# EAGLE board MSP-EXP430FR5739_1_1_4 (EAGLE 5.10)
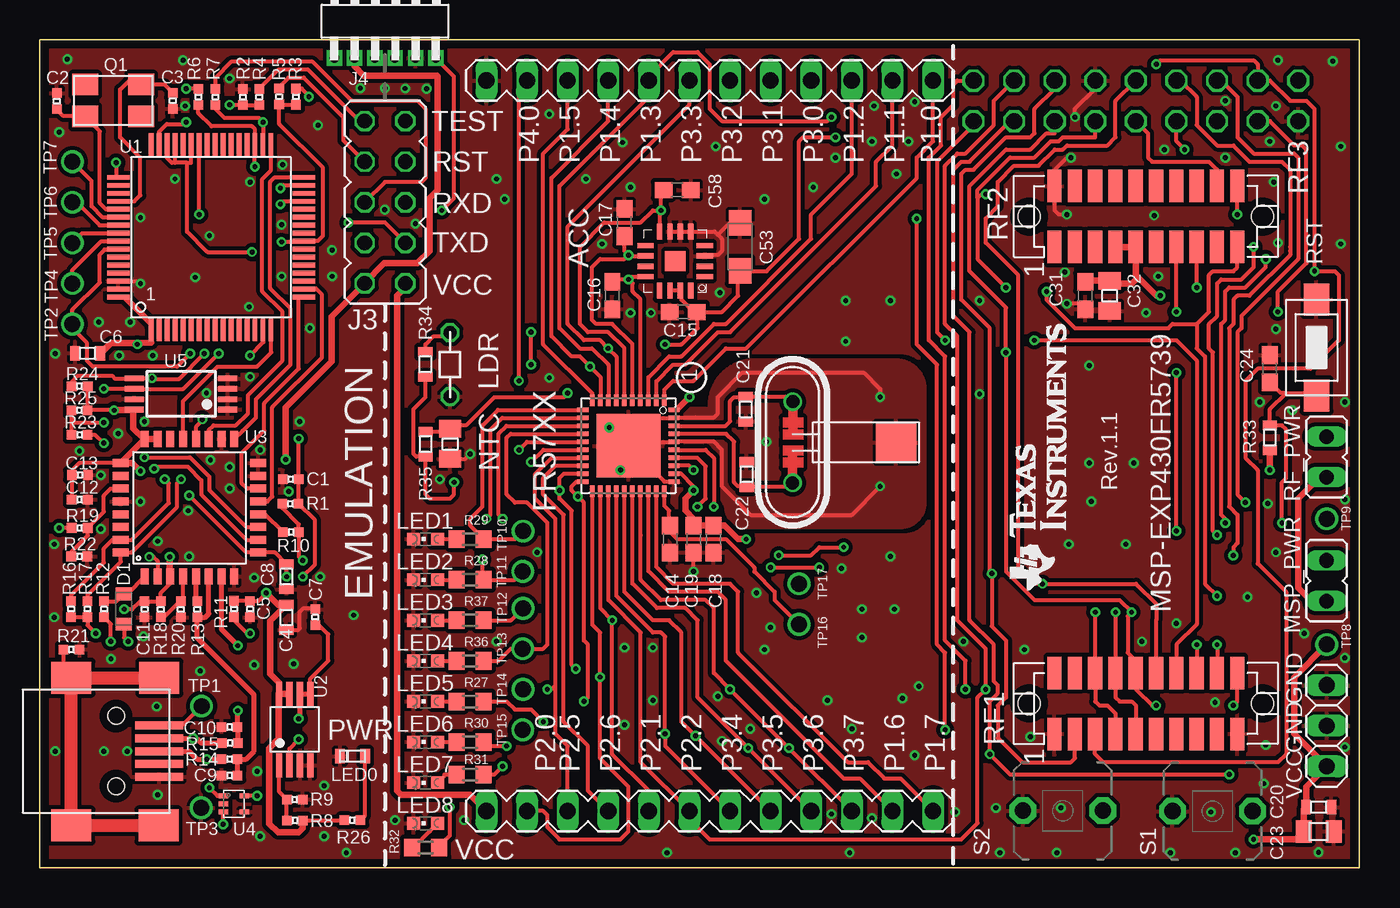
[diagram p0: board, top side]
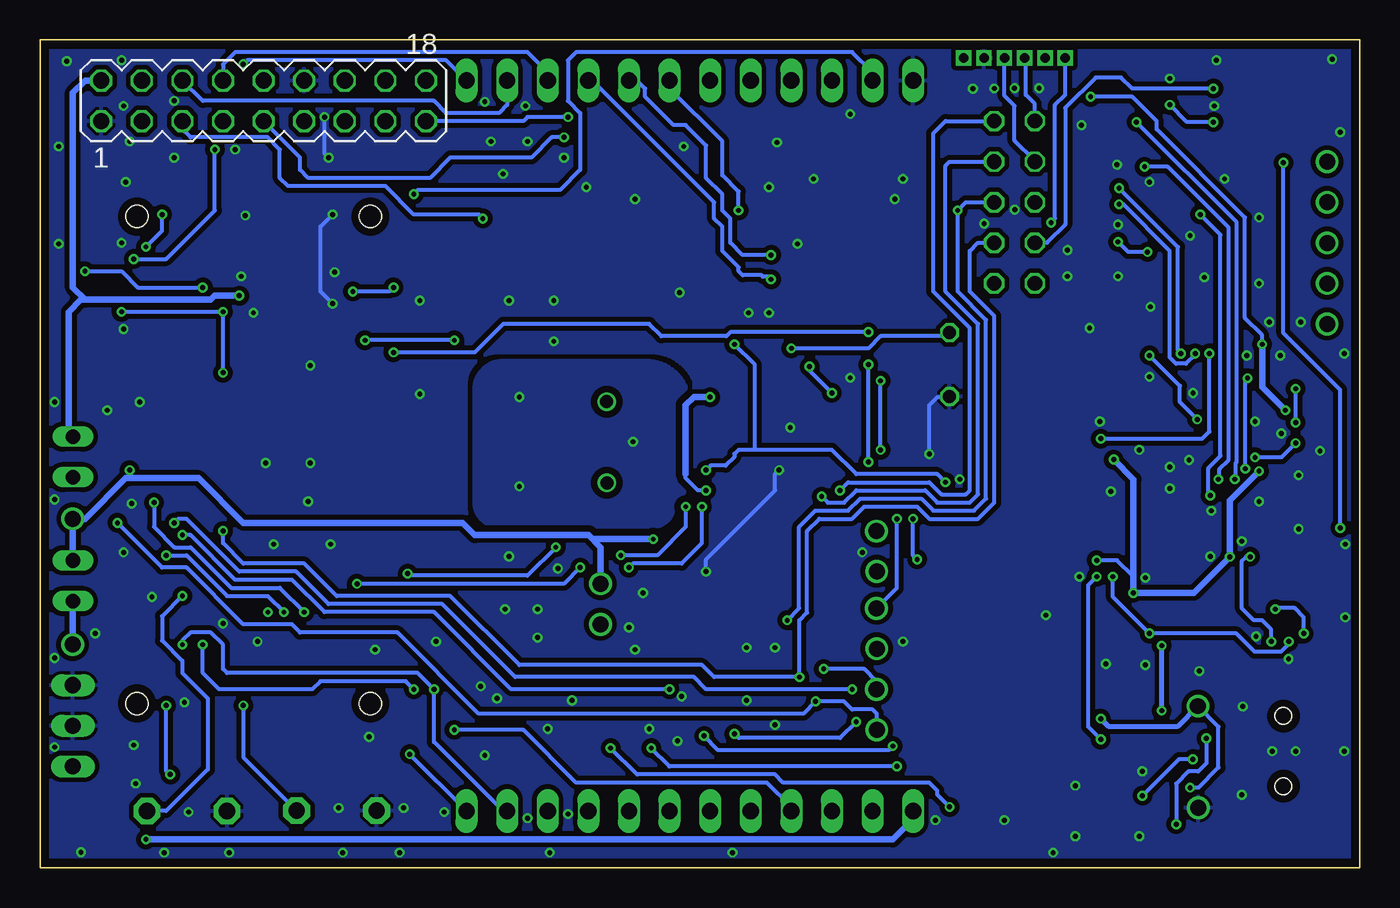
[diagram p1: board, bottom side, seen from below]

Size 82.55 x 51.82 mm. Coordinates in mm from the lower left corner, seen from the top.
Outline: 0,0 82.55,0 82.55,51.82 0,51.82 0,0
Copper layers (1+2*15+16): Top 0.0178mm / dielectric 0.3048mm / Route2 0.0356mm / dielectric 0.6858mm / Route15 0.0356mm / dielectric 0.3048mm / Bottom 0.0178mm
Design rules "FR57xx Design Rules *": minimum track width 6mil, minimum drill 10mil, track to track 6mil, track to pad 6mil, pad to pad 6mil, via to via 6mil, smd to smd 6mil, copper to edge 20mil, drill to drill 8mil, minimum pad ring 7mil, minimum via ring 6mil, stop-mask expansion 0mil, vias tented up to drill 25mil, thermal gap 8mil
Net classes: 0 default: width 0.1 mm, drill 0.2 mm; 1 Ground: width 0.203 mm, drill 0.61 mm; 2 Power: width 0.406 mm, drill 0.305 mm, clearance 0.152 mm to class 0, clearance 0.152 mm to class 1, clearance 0.152 mm

## Footprints (pad centres in the part's own frame; a part is rotated, then mirrored left to right if it is on the bottom)
RSA16 = smd 1.016 x 0.33: 1 -1.85,0.975; 2 -1.85,0.325; 3 -1.85,-0.325; 4 -1.85,-0.975; 9 1.85,-0.975; 10 1.85,-0.325; 11 1.85,0.325; 12 1.85,0.975 | smd 0.33 x 1.016: 5 -0.975,-1.85; 6 -0.325,-1.85; 7 0.325,-1.85; 8 0.975,-1.85; 13 0.975,1.85; 14 0.325,1.85; 15 -0.325,1.85; 16 -0.975,1.85 | smd 1.27 x 1.27: TP 0,0
0402 = smd 0.6 x 0.6: 1 -0.501,0; 2 0.501,0
0603 = smd 0.6 x 0.9: 1 -0.787,0; 2 0.787,0
C0603 = smd 1.1 x 1: 1 -0.85,0; 2 0.85,0
0805 = smd 1 x 1.4: 1 -0.94,0; 2 0.94,0
CSMD0805 = smd 1.092 x 1.397: 1 -0.94,0; 2 0.94,0
SMC_A = smd 1.6 x 1.4: + -1.5,0; - 1.5,0
SOD110-R = smd 0.8 x 1: A 0.95,0; C -0.95,0
RHA40 = smd 0.7 x 0.3: 1 -2.85,2.25; 2 -2.85,1.75; 3 -2.85,1.25; 4 -2.85,0.75; 5 -2.85,0.25; 6 -2.85,-0.25; 7 -2.85,-0.75; 8 -2.85,-1.25; 9 -2.85,-1.75; 10 -2.85,-2.25; 21 2.85,-2.25; 22 2.85,-1.75; 23 2.85,-1.25; 24 2.85,-0.75; 25 2.85,-0.25; 26 2.85,0.25; 27 2.85,0.75; 28 2.85,1.25; 29 2.85,1.75; 30 2.85,2.25 | smd 0.3 x 0.7: 11 -2.25,-2.85; 12 -1.75,-2.85; 13 -1.25,-2.85; 14 -0.75,-2.85; 15 -0.25,-2.85; 16 0.25,-2.85; 17 0.75,-2.85; 18 1.25,-2.85; 19 1.75,-2.85; 20 2.25,-2.85; 31 2.25,2.85; 32 1.75,2.85; 33 1.25,2.85; 34 0.75,2.85; 35 0.25,2.85; 36 -0.25,2.85; 37 -0.75,2.85; 38 -1.25,2.85; 39 -1.75,2.85; 40 -2.25,2.85 | smd 4 x 4: TP 0,0
JP5Q = drill 0.914 octagon: 1 -5.08,-1.27; 2 -5.08,1.27; 3 -2.54,-1.27; 4 -2.54,1.27; 5 0,-1.27; 6 0,1.27; 7 2.54,-1.27; 8 2.54,1.27; 9 5.08,-1.27; 10 5.08,1.27
SL127L6_MPE = drill 0.6 pad 0.889 square: 1 -3.17,0.07; 2 -1.91,0.07; 3 -0.63,0.07; 4 0.63,0.07; 5 1.91,0.07; 6 3.18,0.07
1X03 = drill 1.016 long: 1 -2.54,0; 2 0,0; 3 2.54,0
R-3,4 = drill 0.813 octagon: 1 -2.003,0; 2 2.003,0
DIODE0603 = smd 0.6 x 0.9: A -0.787,0; K 0.787,0
CHIPLED_0603 = smd 0.8 x 0.8: A 0,-0.75; C 0,0.75
JP1 = drill 0.914 long: 1 0,-1.27; 2 0,1.27
0805' = smd 1.092 x 1.397: 1 -0.94,0; 2 0.94,0
FT10A = smd 1.6 x 1.35: P$1 -1.75,-1; P$2 1.75,-1; P$3 1.75,1; P$4 -1.75,1
QUARZ5 = drill 0.813 round: 1 1.53,1.773; 2 1.52,-3.303 | smd 2.54 x 2.54: GND@0 -4.941,-0.762
R0603 = smd 1 x 1.1: 1 -0.85,0; 2 0.85,0
TFM-110-02-SM-D-A-K = smd 2.032 x 0.889: 1 -1.27,5.08; 2 2.54,5.08; 3 -1.27,3.81; 4 2.54,3.81; 5 -1.27,2.54; 6 2.54,2.54; 7 -1.27,1.27; 8 2.54,1.27; 9 -1.27,0; 10 2.54,0; 11 -1.27,-1.27; 12 2.54,-1.27; 13 -1.27,-2.54; 14 2.54,-2.54; 15 -1.27,-3.81; 16 2.54,-3.81; 17 -1.27,-5.08; 18 2.54,-5.08; 19 -1.27,-6.35; 20 2.54,-6.35 | hole 1.359: 0.635,6.668; 0.635,-7.938
MA09-2 = drill 1.016 octagon: 1 -10.16,-1.27; 2 -10.16,1.27; 3 -7.62,-1.27; 4 -7.62,1.27; 5 -5.08,-1.27; 6 -5.08,1.27; 7 -2.54,-1.27; 8 -2.54,1.27; 9 0,-1.27; 10 0,1.27; 11 2.54,-1.27; 12 2.54,1.27; 13 5.08,-1.27; 14 5.08,1.27; 15 7.62,-1.27; 16 7.62,1.27; 17 10.16,-1.27; 18 10.16,1.27
EVQPPDA = smd 2 x 1.6: 1 -3,0; 2 3,0
PBTH = drill 1.016 pad 1.676 octagon: 1 -0.001,0.001; 2 5.001,0.001
MA12-1 = drill 1.016 long: 1 -13.97,0; 2 -11.43,0; 3 -8.89,0; 4 -6.35,0; 5 -3.81,0; 6 -1.27,0; 7 1.27,0; 8 3.81,0; 9 6.35,0; 10 8.89,0; 11 11.43,0; 12 13.97,0
TP10 = drill 1 pad 1.422 round: 1 0,0
PM/PAG64 = smd 1.4 x 0.3: 1 -5.88,3.67; 2 -5.88,3.17; 3 -5.88,2.67; 4 -5.88,2.17; 5 -5.88,1.67; 6 -5.88,1.17; 7 -5.88,0.67; 8 -5.88,0.17; 9 -5.88,-0.33; 10 -5.88,-0.83; 11 -5.88,-1.33; 12 -5.88,-1.83; 13 -5.88,-2.33; 14 -5.88,-2.83; 15 -5.88,-3.33; 16 -5.88,-3.83; 33 5.72,-3.83; 34 5.72,-3.33; 35 5.72,-2.83; 36 5.72,-2.33; 37 5.72,-1.83; 38 5.72,-1.33; 39 5.72,-0.83; 40 5.72,-0.33; 41 5.72,0.17; 42 5.72,0.67; 43 5.72,1.17; 44 5.72,1.67; 45 5.72,2.17; 46 5.72,2.67; 47 5.72,3.17; 48 5.72,3.67 | smd 0.3 x 1.4: 17 -3.83,-5.88; 18 -3.33,-5.88; 19 -2.83,-5.88; 20 -2.33,-5.88; 21 -1.83,-5.88; 22 -1.33,-5.88; 23 -0.83,-5.88; 24 -0.33,-5.88; 25 0.17,-5.88; 26 0.67,-5.88; 27 1.17,-5.88; 28 1.67,-5.88; 29 2.17,-5.88; 30 2.67,-5.88; 31 3.17,-5.88; 32 3.67,-5.88; 49 3.67,5.72; 50 3.17,5.72; 51 2.67,5.72; 52 2.17,5.72; 53 1.67,5.72; 54 1.17,5.72; 55 0.67,5.72; 56 0.17,5.72; 57 -0.33,5.72; 58 -0.83,5.72; 59 -1.33,5.72; 60 -1.83,5.72; 61 -2.33,5.72; 62 -2.83,5.72; 63 -3.33,5.72; 64 -3.83,5.72
MSOP8 = smd 0.4 x 1.5: 1 -0.978,-2.3; 2 -0.333,-2.3; 3 0.323,-2.3; 4 0.968,-2.3; 5 0.968,2.18; 6 0.323,2.18; 7 -0.333,2.18; 8 -0.978,2.18
QFP32 = smd 0.5 x 1: 1 -2.8,-4.3; 2 -2,-4.3; 3 -1.2,-4.3; 4 -0.4,-4.3; 5 0.4,-4.3; 6 1.2,-4.3; 7 2,-4.3; 8 2.8,-4.3; 17 2.8,4.3; 18 2,4.3; 19 1.2,4.3; 20 0.4,4.3; 21 -0.4,4.3; 22 -1.2,4.3; 23 -2,4.3; 24 -2.8,4.3 | smd 1 x 0.5: 9 4.3,-2.8; 10 4.3,-2; 11 4.3,-1.2; 12 4.3,-0.4; 13 4.3,0.4; 14 4.3,1.2; 15 4.3,2; 16 4.3,2.8; 25 -4.3,2.8; 26 -4.3,2; 27 -4.3,1.2; 28 -4.3,0.4; 29 -4.3,-0.4; 30 -4.3,-1.2; 31 -4.3,-2; 32 -4.3,-2.8
TPD2E001-DRL = smd 0.3 x 0.6: 1 -0.5,-0.65; 2 0,-0.65; 3 0.5,-0.65; 4 0.5,0.65; 5 -0.5,0.65
TSSOP8 = smd 1.2 x 0.35: 1 -2.925,0.975; 2 -2.925,0.325; 3 -2.925,-0.325; 4 -2.925,-0.975; 5 2.925,-0.975; 6 2.925,-0.325; 7 2.925,0.325; 8 2.925,0.975
USB_MINI_B = smd 0.5 x 3: 1 -1.6,8.55; 2 -0.8,8.55; 3 0,8.55; 4 0.8,8.55; 5 1.6,8.55 | smd 2 x 2.5: S1 -4.6,8.55; S2 -4.6,3.05; S3 4.65,3.05; S4 4.65,8.5 | hole 1.016: -2.2,5.85; 2.2,5.85

## Placement (x,y rotation side)
ACC  ADXL322/330  [RSA16]  39.75,37.97 180 top
C1  10n  [0402]  15.69,24.32 180 top
C2  16p  [0402]  1.06,47.99 90 top
C3  16p  [0402]  8.31,48.01 270 top
C4  1u/6.3V  [0603]  15.42,15.67 90 top
C5  100n  [0402]  13.14,16.19 270 top
C6  1u/6.3V  [0603]  2.98,32.21 180 top
C7  100n  [0402]  17.23,15.68 270 top
C8  1u/6.3V  [0603]  15.43,18.22 270 top
C9  22p  [0402]  11.86,5.78 0 top
C10  22p  [0402]  11.86,8.82 0 top
C11  100n  [0402]  6.55,16.19 90 top
C12  100n  [0402]  2.49,23.05 180 top
C13  100n  [0402]  2.49,24.59 0 top
C14  470n  [C0603]  39.43,20.57 270 top
C15  .1u  [C0603]  40.26,34.8 180 top
C16  .1u  [C0603]  35.81,35.81 270 top
C17  .1u  [C0603]  36.58,40.39 90 top
C18  0.1u  [C0603]  42.14,20.57 270 top
C19  10u  [C0603]  40.89,20.57 270 top
C20  100nF  [0603]  80.02,3.8 180 top
C21  12pF  [0603]  44.17,28.71 90 top
C22  12pF  [0603]  44.22,24.61 270 top
C23  10uF/10V  [0805]  80.02,2.27 180 top
C24  2.2n  [C0603]  76.96,31.24 90 top
C31  .1u  [C0603]  65.41,35.81 270 top
C32  4.7u  [CSMD0805]  66.94,35.8 270 top
C53  4.7u  [SMC_A]  43.81,38.86 90 top
C58  .1u  [C0603]  39.88,42.42 0 top
D1  1N4148  [SOD110-R]  5.25,16.2 90 top
FR57XX  FR57XX--RHA40RHAPACKAGE  [RHA40]  36.82,26.42 270 top
J3  [JP5Q]  21.59,41.66 90 top
J4  SL127L6TH  [SL127L6_MPE]  21.59,50.61 0 top
J6  [1X03]  80.52,8.89 90 top
LDR  [R-3,4]  25.65,31.5 270 top
LED0  green  [DIODE0603]  19.56,6.99 180 top
LED1  [CHIPLED_0603]  24.13,20.57 90 top
LED2  [CHIPLED_0603]  24.13,18.03 90 top
LED3  [CHIPLED_0603]  24.13,15.49 90 top
LED4  [CHIPLED_0603]  24.13,12.95 90 top
LED5  [CHIPLED_0603]  24.13,10.41 90 top
LED6  [CHIPLED_0603]  24.13,7.87 90 top
LED7  [CHIPLED_0603]  24.13,5.33 90 top
LED8  [CHIPLED_0603]  24.13,2.79 90 top
MSP_PWR  [JP1]  80.52,17.97 0 top
NTC  100k  [0805']  25.67,26.53 90 top
Q1  12MHz  [FT10A]  4.58,48.02 0 top
Q2  QUARZ5  [QUARZ5]  48.63,25.87 180 top
R1  47k  [0402]  15.68,22.79 180 top
R2  47k  [0402]  12.7,48.24 90 top
R3  47k  [0402]  16.01,48.26 90 top
R4  100R  [0402]  13.72,48.25 90 top
R5  100R  [0402]  14.97,48.28 90 top
R6  100R  [0402]  9.91,48.26 90 top
R7  100R  [0402]  10.98,48.25 90 top
R8  61k5  [0402]  15.95,2.97 0 top
R9  33k  [0402]  15.95,4.27 180 top
R10  10k  [0402]  15.71,21.01 0 top
R11  15k  [0402]  12.15,16.2 90 top
R12  33k  [0402]  4.02,16.18 270 top
R13  1k5  [0402]  9.84,16.18 90 top
R14  33R  [0402]  11.87,6.81 0 top
R15  33R  [0402]  11.89,7.82 0 top
R16  47k  [0402]  1.95,16.19 270 top
R17  47k  [0402]  2.97,16.19 270 top
R18  100k/1%  [0402]  7.56,16.18 90 top
R19  3k3  [0402]  2.49,21.27 180 top
R20  100k/1%  [0402]  8.82,16.18 90 top
R21  33k  [0402]  1.98,13.66 180 top
R22  3k3  [0402]  2.46,19.49 0 top
R23  100R  [0402]  2.48,27.1 0 top
R24  1k5  [0402]  2.49,30.14 180 top
R25  1k5  [0402]  2.48,28.64 180 top
R26  270  [0402]  19.56,2.98 180 top
R27  330  [R0603]  26.92,10.41 0 top
R28  330  [R0603]  26.92,18.03 0 top
R29  330  [R0603]  26.92,20.57 0 top
R30  330  [R0603]  26.92,7.87 0 top
R31  330  [R0603]  26.92,5.84 0 top
R32  330  [R0603]  24.13,1.27 0 top
R33  47k  [0603]  76.96,26.92 270 top
R34  0R  [0603]  24.12,31.51 270 top
R35  470k  [0603]  24.13,26.52 270 top
R36  330  [R0603]  26.92,12.95 0 top
R37  330  [R0603]  26.92,15.49 0 top
RF1  [TFM-110-02-SM-D-A-K]  68.57,9.65 90 top
RF2  [TFM-110-02-SM-D-A-K]  68.57,40.13 90 top
RF3  eZ-RF  [MA09-2]  68.58,48.01 0 bottom
RF_PWR  RF_PWR  [JP1]  80.52,25.72 0 top
RST  [EVQPPDA]  79.88,32.56 270 top
S1  [PBTH]  70.88,3.55 0 top
S2  [PBTH]  61.5,3.58 0 top
SV1  [MA12-1]  41.91,49.28 180 top
SV2  [MA12-1]  41.91,3.56 180 top
TP1  TP05TP10  [TP10]  10.11,10.12 90 top
TP2  TP05TP10  [TP10]  2.03,34.03 90 top
TP3  TP05TP10  [TP10]  10.09,3.76 90 top
TP4  TP05TP10  [TP10]  2.03,36.58 90 top
TP5  TP05TP10  [TP10]  2.03,39.11 90 top
TP6  TP05TP10  [TP10]  2.03,41.66 90 top
TP7  TP05TP10  [TP10]  2.03,44.2 90 top
TP8  TP05TP10  [TP10]  80.53,13.97 90 top
TP9  TP05TP10  [TP10]  80.52,21.84 0 top
TP10  TP05TP10  [TP10]  30.23,21.07 0 top
TP11  TP05TP10  [TP10]  30.21,18.55 0 top
TP12  TP05TP10  [TP10]  30.23,16.24 0 top
TP13  TP05TP10  [TP10]  30.21,13.72 0 top
TP14  TP05TP10  [TP10]  30.23,11.18 0 top
TP15  TP05TP10  [TP10]  30.21,8.64 0 top
TP16  TP05TP10  [TP10]  47.5,15.24 0 top
TP17  TP05TP10  [TP10]  47.5,17.78 0 top
U1  F16X---PM64  [PM/PAG64]  10.63,39.55 90 top
U2  TPS77301DGK  [MSOP8]  15.95,8.72 0 top
U3  TUSB3410VF  [QFP32]  9.36,22.53 0 top
U4  TPD2E001  [TPD2E001-DRL]  12.14,4 270 top
U5  CAT24FC32UI  [TSSOP8]  8.83,29.66 180 top
U$1  [LOGO16_TPLACE]  64.39,17.27 90 top
U$2  USB_MINI_B5  [USB_MINI_B]  -1.08,7.3 270 top

## Library data of the parts
ACC = _5438_ATC
C1-C13 LED0 NTC R1-R26 = SMD
C14-C19 C24 C31 C53 C58 R27-R32 R36 R37 = rcl
C20-C23 R33-R35 = ssmd
C32 = CAP
D1 = diode
FR57XX = TI_MSP430_v16_intern
J3 = sTI Lib
J4 Q1 U$2 = susbfet
J6 = pinhead
LDR = varistor
LED1-LED8 = led
MSP_PWR RF_PWR = jumper
Q2 = sMSP430
RF1 RF2 = _MSP430_RF
RF3 SV1 SV2 = con-lstb
RST = MSP430
S1 S2 = electricalmeter
TP1-TP17 U3 U5 = usbfet
U1 = TI_MSP430_v11
U2 = gangprog
U4 = Project7264
U$1 = sti_logo

## Nets
BRXD: J3.4 R6.2
BRXDI: R6.1 R17.1 U1.35 U3.32
BTXD: J3.6 R7.2
BTXDI: R7.1 R16.1 U1.34 U3.31
CLK3410: R19.2 U1.49
EZ_D+: R14.1 U4.5 U$2.3
EZ_D-: R15.1 U4.3 U$2.2
EZ_VBUS: C7.2 TP1.1 U2.5 U2.6 U4.1 U$2.1
EZ_VCC: C4.2 C5.1 C6.1 C11.2 C12.2 C13.1 J3.2 J4.2 R1.2 R3.2 R8.2 R10.2 R11.2 R16.2 R17.2 R18.2 R24.1 R25.1 R26.2 U1.1 U1.64 U2.7 U2.8 U3.3 U3.23 U3.24 U3.25 U5.8
GND [Ground]: ACC.3 ACC.5 ACC.6 ACC.7 C1.2 C2.2 C3.2 C4.1 C5.2 C6.2 C7.1 C8.2 C9.1 C10.1 C11.1 C12.1 C13.2 C14.2 C15.2 C16.2 C17.2 C18.2 C19.2 C20.1 C23.1 C24.2 C31.2 C32.2 C53.- C58.2 FR57XX.31 FR57XX.36 FR57XX.39 FR57XX.TP J4.5 J6.2 J6.3 LDR.2 LED0.K LED1.C LED2.C LED3.C LED4.C LED5.C LED6.C LED7.C LED8.C NTC.1 R2.2 R9.1 R20.1 R21.1 R22.2 RF1.1 RF1.19 RF2.2 RF3.1 RF3.12 RST.1 S1.1 S2.1 SV1.12 TP3.1 U1.62 U1.63 U2.3 U2.4 U3.8 U3.15 U3.16 U3.18 U3.28 U4.4 U5.1 U5.2 U5.3 U5.4 U5.7 U$2.5
HTCK: TP4.1 U1.57
HTDI: TP6.1 U1.55
HTDO: TP7.1 U1.54
HTMS: TP5.1 U1.56
ID: U$2.4
N$1: R2.1 R4.1 U1.47
N$2: R3.1 R5.1 U1.24 U1.43 U1.45 U1.46
N$3: R19.1 R22.1 U3.27
N$4: R8.1 R9.2 U2.1
N$5: D1.A R12.1 U3.1
N$6: D1.C U3.2
N$7: LED6.A R30.1
N$8: LED7.A R31.1
N$9: R10.1 U3.12
N$10: LED5.A R27.1
N$11: LED8.A R32.1
N$12: LED2.A R28.1
N$13: LED1.A R29.1
N$16: R23.2 U3.11
N$17: R18.1 R20.2 U3.4
N$18: LED4.A R36.1
N$19: LED0.A R26.1
N$22: R21.2 U$2.S1 U$2.S2 U$2.S3 U$2.S4
N$23: LED3.A R37.1
N$26: R13.2 U3.5
N$30: C10.2 R15.2 U3.7
N$31: C9.2 R13.1 R14.2 U3.6
P1.0: FR57XX.1 RF1.5 RF2.15 RF3.4 SV1.1
P1.1: FR57XX.2 RF1.6 RF1.7 RF3.6 SV1.2
P1.2: FR57XX.3 RF1.8 RF1.9 RF3.8 SV1.3
P1.3: FR57XX.8 RF1.14 RF3.17 SV1.8
P1.4: FR57XX.9 NTC.2 R35.1 SV1.9
P1.5: FR57XX.10 SV1.10
P1.6: FR57XX.28 RF1.18 RF3.18 SV2.2
P1.7: FR57XX.29 RF1.20 RF3.15 SV2.1
P2.0: FR57XX.21 J3.3 J4.1 RF2.13 RF3.3 SV2.11
P2.1: FR57XX.22 J3.5 J4.6 SV2.8
P2.2: FR57XX.23 RF1.16 RF3.16 SV2.7
P2.3: FR57XX.34 RF1.12 RF3.10
P2.4: FR57XX.35 RF1.3 RF3.14
P2.5: FR57XX.17 RF3.7 SV2.10
P2.6: FR57XX.18 RF3.5 SV2.9
P2.7: ACC.14 ACC.15 C15.1 C53.+ FR57XX.33 R34.2 R35.2 RF2.18 RF3.9
P3.0: ACC.12 C16.1 FR57XX.4 SV1.4
P3.1: ACC.10 C17.1 FR57XX.5 SV1.5
P3.2: ACC.8 C58.1 FR57XX.6 SV1.6
P3.3: FR57XX.7 LDR.1 R34.1 SV1.7
P3.4: FR57XX.24 R27.2 SV2.6
P3.5: FR57XX.25 R30.2 SV2.5
P3.6: FR57XX.26 R31.2 SV2.4
P3.7: FR57XX.27 R32.2 RF2.20 SV2.3
P4.0: FR57XX.15 RF2.19 RF3.11 S1.2 SV1.11
P4.1: FR57XX.16 RF1.10 RF3.13 S2.2
PJ.0: FR57XX.11 R29.2 TP10.1
PJ.1: FR57XX.12 R28.2 TP11.1
PJ.2: FR57XX.13 R37.2 TP12.1
PJ.3: FR57XX.14 R36.2 TP13.1
RESET: C1.1 R1.1 TP2.1 U1.58 U2.2
RFPWR: C31.1 C32.1 RF2.7 RF2.9 RF3.2 RF_PWR.2
RST3410: C8.1 R11.1 R12.2 U1.42 U3.9
RST/SBWTDIO: C24.1 FR57XX.20 J3.7 R33.1 RST.2 TP15.1
SBWTCK: J3.10 J4.3 R4.2
SBWTDIO: J3.8 J4.4 R5.2
SCL: R23.1 R25.2 U1.31 U5.6
SDA: R24.2 U1.29 U3.10 U5.5
TEST/SBWTCK: FR57XX.19 J3.9 TP14.1
UCTS: U1.18 U3.13
UDSR: U1.17 U3.14
UDTR: U1.16 U3.21
URTS: U1.15 U3.20
URXD: U1.33 U3.19
UTXD: U1.32 U3.17
VCC: C20.2 C23.2 J3.1 J6.1 MSP_PWR.1 RF_PWR.1 SV2.12 TP8.1
VCC_MSP: C18.1 C19.1 FR57XX.32 FR57XX.40 MSP_PWR.2 R33.2 TP9.1 TP17.1
VCORE: C14.1 FR57XX.30 TP16.1
XIN1: C3.1 Q1.P$3 U1.52
XINR: C22.2 FR57XX.37 Q2.1
XOUT1: C2.1 Q1.P$1 U1.53
XOUTR: C21.2 FR57XX.38 Q2.2
XT1_GND: C21.1 C22.1 Q2.GND@0

## Tracks (layer width: path | path; a pad name or v marks a point on that pad's centre or on a via)
BRXD  (via drill 0.3)
  Top 0.254: R6.2 9.91,48.77 | 9.91,48.77 9.91,48.89 | 9.91,48.77 9.9,48.77 v9.14,48.77
  Bottom 0.254: v9.14,48.77 14.22,48.77 14.92,49.47 16.51,49.47 18.41,47.56 18.41,40.26 19.56,39.12 J3.4
BRXDI  (via drill 0.3)
  Top 0.254: R17.1 2.98,16.7 2.98,17.08 5.06,19.16 U3.32 5.08,19.75 5.73,19.75 8.57,22.59 8.57,24.07 v8.83,24.32 | v13.45,43.88 U1.35 13.46,46.23 13.27,46.42 10.73,46.42 9.91,47.23 R6.1
  Bottom 0.254: v8.83,24.32 8.76,24.32 8.76,24.95 8.19,25.53 8.19,40.07 12,43.88 v13.45,43.88
BTXD
  Top 0.254: R7.2 10.99,49.47 12,50.48 17.02,50.48 19.49,48.01 23.62,48.01 24.13,47.5 24.13,43.18 23.88,42.93 21.59,42.93 J3.6
BTXDI  (via drill 0.3)
  Top 0.254: R16.1 1.97,16.71 1.97,17.08 4,19.11 4,20 4.53,20.53 U3.31 5.08,20.51 5.75,20.51 8.06,22.82 8.06,24.07 v7.81,24.32 | U1.34 v13.96,46.67 13.7,46.93 11.56,46.93 10.99,47.49 R7.1 | U1.34
  Bottom 0.254: v7.81,24.32 7.75,24.32 7.75,25.34 7.68,25.4 7.68,40.4 v13.96,46.67 13.96,46.6
CLK3410  (via drill 0.3)
  Top 0.254: R19.2 v1.21,21.27 | U1.49 4.91,43.2 4.89,43.18 4.76,43.31 v4.76,44.13
  Bottom 0.254: v1.21,21.27 1.21,29.91 4.76,33.46 v4.76,44.13
EZ_D+  (via drill 0.3)
  Top 0.254: U4.5 13.65,4.5 v13.59,4.51
  Top 0.305: U$2.3 9.34,7.3 9.84,6.79 v10.43,6.79 R14.1
  Bottom 0.254: v13.59,4.51 11.3,6.79 v10.43,6.79
EZ_D-  (via drill 0.3)
  Top 0.254: U4.3 11.47,3.48 v11.47,2.73
  Top 0.305: U$2.2 v9.59,8.1 9.8,8.1 10.1,7.81 R15.1
  Bottom 0.254: v11.47,2.73 11.47,5.27 10.71,6.03 10.1,6.03 9.59,6.54 v9.59,8.1
EZ_VBUS  (via drill 0.3)
  Top 0.254: TP1.1 8.89,8.9 U$2.1 | U4.1 11.12,4.5 v10.6,5.02 | U2.5 16.91,11.84 18.03,12.95 18.03,14.62 17.42,15.23 17.27,15.23 | 17.27,15.23 17.17,15.23 | C7.2 17.27,15.23
  Top 0.305: U2.5 U2.6 16.27,9.41 v16.19,9.34
  Bottom 0.254: v10.6,5.02 10.1,5.02 8.83,6.29 8.83,8.84 TP1.1
  Bottom 0.305: v16.19,9.34 15.68,8.83 11.41,8.83 TP1.1
EZ_VCC  (via drill 0.3)
  Top 0.254: 14.95,10.88 U2.8 14.97,11.57 | 8.16,17.81 U3.3 | 8.16,17.81 7.56,17.21 R18.2 | R18.2 | R18.2 C11.2 6.28,16.69 5.78,16.19 v5.27,16.19 | R16.2 R17.2 2.98,15.68 2.98,15.18 v3.49,14.67 | 8.16,17.81 8.12,17.86 | v14.16,17.21 13.64,16.69 C5.1 13.13,16.71 R11.2 | 14.91,16.46 C4.2 | R1.2 15.18,22.51 16.19,21.5 16.19,21.03 R10.2 16.22,21.02 16.22,19.47 v16.45,19.24 | C12.2 C13.1 1.99,24.85 2.47,25.33 U3.25 | R25.1 | R25.1 R24.1 | U1.1 6.97,33.68 | C6.1 4.32,32.83 6.1,32.85 | 6.95,32.87 6.95,33.66 U1.1 | v4.64,28.64 R25.1 | 5.86,28.64 U5.8 5.84,28.62 | U3.24 6.51,26.83 | v6.1,32.77 6.33,32.85 | U1.1 6.89,34.13 | 5.37,35.65 U1.64 | R3.2 16.38,48.77 16.83,48.32 v16.83,48.26 | R26.2 19.04,2.97 R8.2 | 20.31,36.6 20.32,36.59 J3.2 | 24.89,49.53 24.84,49.58 | 23.65,37.85 23.65,37.87
  Top 0.406: R8.2 16.45,2.48 16.19,2.22 14.9,2.22 14.35,2.77 14.35,7.49 14.95,8.09 14.95,10.88 | U2.8 U2.7 | 8.12,17.86 v8.12,19.47 | v14.16,17.21 14.91,16.46 | C4.2 14.41,15.46 14.41,12.13 14.97,11.57 | U3.25 U3.24 U3.23 | U3.25 5.78,25.34 v6.29,24.83 | 6.1,32.85 6.95,32.87 | 5.86,28.64 v4.64,28.64 | 6.51,26.83 5.84,27.5 5.84,28.62 | 6.33,32.85 4.45,32.83 3.83,32.21 C6.1 | 6.89,34.13 5.37,35.65 | J3.2 18.26,34.52 18.26,31.7 15.38,28.82 v15.38,25.56 | J4.2 19.68,50.17 20.27,49.58 24.84,49.58 | 23.65,37.85 21.55,37.85 20.31,36.6 | 24.89,49.53 24.89,42.42 24.38,41.91 24.38,38.61 23.65,37.87
  Bottom 0.254: v14.16,17.21 14.16,18.23 15.18,19.24 v16.45,19.24 | v6.1,32.77 6.1,33.34 7.18,34.42 7.18,40.7 12.7,46.23 12.7,46.74 14.22,48.26 v16.83,48.26 | v3.49,14.67 3.49,15.68 4.06,16.26 5.21,16.26 v5.27,16.19
  Bottom 0.406: v6.29,24.83 8.12,23 v8.12,19.47 10.38,17.21 v14.16,17.21 14.14,17.19 | v6.1,32.77 6.1,30.1 v4.64,28.64 | 14.14,17.19 14.14,17.16 | v15.38,25.56 14.14,24.32 14.14,17.19
GND  (via drill 0.3, 0.3 pad 0.25)
  Top 0.254: FR57XX.TP 37.33,26.93 37.6,26.67 FR57XX.36 | FR57XX.31 39.08,24.17 38.35,24.89 38.35,26.16 | FR57XX.36 | FR57XX.TP 37.07,26.67 | FR57XX.TP 37.34,25.91 v36.32,24.89 | v64.26,40.89 63.75,40.89 63.5,41.15 63.5,42.66 RF2.2 63.5,43.69 64.26,44.45 v64.52,44.45 | RF3.12 66.04,48.77 64.77,47.5 v64.77,46.99 | 37.54,28.14 37.57,28.17 | FR57XX.36 | 38.58,28.17 FR57XX.39 | U1.62 6.14,36.72 v6.29,36.58 | v40.89,18.54 C19.2 | ACC.7 ACC.6 ACC.5 42.22,39.82 42.42,39.62 | 42.42,39.62 42.67,39.37 42.67,38.61 42.42,38.35 41.66,38.35 ACC.3 | C53.- 43.92,40.36 43.94,40.39 43.18,40.39 42.42,39.62 | NTC.1 26.61,25.59 v26.92,25.91 | v64.26,35.31 65.06,35.31 C31.2 | C4.1 16.16,14.89 16.26,14.99 16.26,16 16.51,16.26 17.15,16.26 C7.1
  Top 0.406: 38.58,28.17 36.83,28.17 36.83,28.14 | 36.83,28.14 36.83,27.69 35.62,27.69 v35.62,27.56 | 36.83,28.14 37.54,28.14 | 37.6,26.67 35.56,26.67 35.56,27.43 38.35,27.43 38.35,26.16
  Bottom 0.254: v36.32,24.89 36.58,24.64 36.58,23.62 40.89,19.3 v40.89,18.54 | v64.26,40.89 65.02,40.13 65.02,36.07 v64.26,35.31 | v64.77,46.99 64.77,44.7 v64.52,44.45 | v26.92,25.91 26.92,28.96 26.42,29.46 25.68,29.46 LDR.2
  other vias: 4,7.3 5.46,7.3 4.45,13.08 3.81,21.21 3.81,24.57 2.48,26.1 6.54,27.94 10.67,25.53 11.87,23.75 11.87,25.08 9.33,19.49 13.4,18.16 6.29,22.92 7.37,20.45 0.95,32.19 3.68,34.16 5.65,34.16 7.05,32.07 0.89,20.26 0.89,15.68 6.29,40.7 9.72,36.96 15.11,37.02 10.6,39.56 8.45,43.12 13.14,42.93 15.11,40.26 7.3,10.1 7.37,4.57 13.78,1.97 17.78,1.97 17.78,5.14 13.59,6.03 13.4,12.7 10.03,12.32 15.88,12.76 19.62,15.81 0.95,7.3 9.27,22.35 6.48,14.48 10.41,29.72 13.14,30.73 13.78,26.16 4.89,27.18 17.4,46.48 15.56,23.56 4.95,32.07 13.08,35.12 15.18,44.01 1.21,46.04 1.71,50.61 8.95,50.55 11.87,49.4 9.08,47.69 16.26,27.94 17.53,18.22 16.89,33.78 18.29,37.02 24.19,48.77 21.59,48.79 22.86,48.78 18.28,38.66 20.05,48.79 50.8,8.7 36.58,13.78 38.35,13.78 38.35,10.48 36.58,8.95 42.67,7.94 44.45,8.7 42.42,10.73 45.72,15.05 49.28,10.48 49.53,3.37 65.79,22.92 76.71,7.68 80.01,0.98 81.66,7.56 69.98,37.02 58.8,35.5 42.29,45.15 36.45,45.4 50.42,32.96 23.5,40.32 52.2,47.69 54.74,47.94 52.07,3.11 71.12,15.3 61.98,8.19 49.78,44.45 52.07,45.47 54.36,45.47 74.17,44.45 74.17,48.01 77.22,42.93 77.47,39.12 50.42,35.5 45.34,41.85 69.22,34.73 58.8,29.65 65.66,25.34 64.39,20.26 67.94,20.26 77.34,19.75 68.45,25.34 70.74,0.95 73.28,3.49 63.88,3.75 59.82,3.75 57.28,3.49 63.63,0.95 74.8,0.95 76.58,5.27 60.07,0.95 50.67,0.95 57.78,14.16 54.99,11.37 39.24,0.95 22.23,2.98 19.18,0.95 44.83,17.21 45.34,13.65 51.44,16.19 51.44,14.41 53.98,10.6 54.74,7.05 53.47,16.19 50.16,18.73 53.21,19.49 53.21,35.5 48.39,42.61 36.96,42.61 34.16,43.12 29.08,41.85 28.57,43.12 38.23,34.73 69.72,40.83 64.14,37.27 80.9,50.48 81.66,13.14 61.59,13.65 75.56,16.95 76.96,45.47 77.47,50.55 21.58,41.2 36.96,34.73 25.02,24.32 42.55,36 31.88,47.18 31.11,19.75 28.57,14.16 77.34,47.69 31.88,30.67 65.66,31.43 53.59,43.43 26.54,2.98 79.12,14.67 81.66,23.05 81.66,29.15 81.41,39.05 81.41,45.15 76.33,29.15 76.83,22.8 78.36,28.64 77.34,33.72 73.53,10.35 68.96,14.16 35.18,39.05 70.36,44.96
  pour Bottom (isolate 0.305, rank 2): 0,51.82 82.55,51.82 82.55,0 0,0
  pour Top (isolate 0.254, rank 2): 0,51.82 82.55,51.82 82.55,0 0,0
HTCK
  Top 0.254: U1.57 3.85,39.22 2.03,37.4 TP4.1
HTDI
  Top 0.254: U1.55 3.72,40.22 2.54,41.4 2.28,41.4 TP6.1
HTDO
  Top 0.254: TP7.1 3.24,42.99 3.24,41.4 3.94,40.7 4.89,40.7 U1.54
HTMS
  Top 0.254: U1.56 2.63,39.72 TP5.1
N$1  (via drill 0.3)
  Top 0.254: R4.1 R2.1 12.69,47.75 v11.87,47.75 | U1.47 7.46,46.07 7.94,46.55 9.02,46.55 v9.14,46.67
  Bottom 0.254: v9.14,46.67 10.79,46.67 v11.87,47.75
N$2  (via drill 0.3)
  Top 0.254: U1.46 7.96,44.43 8.26,44.13 8.45,44.13 | 9.21,44.13 8.45,44.13 | U1.43 9.46,45.22 9.46,45.21 9.46,44.13 9.21,44.13 | U1.45 8.46,44.14 8.45,44.13 | 9.21,44.13 9.21,39.81 10.48,38.55 v13.27,38.55 | 16.51,39.24 | 16.51,39.24 U1.24 16.53,39.24 17.4,39.24 17.72,39.56 17.72,43.81 14.98,46.55 14.98,47.76 | v15.11,39.18 16.45,39.18 16.51,39.24 | 14.98,47.76 R3.1 | 14.98,47.76 R5.1
  Bottom 0.254: v13.27,38.55 14.48,38.55 v15.11,39.18
N$3
  Top 0.254: R22.1 1.97,19.5 1.97,19.77 2.99,20.8 R19.1 4,22.28 4,23.3 4.42,23.73 U3.27
N$4
  Top 0.254: U2.1 14.97,4.75 R9.2 R8.1
N$5
  Top 0.254: R12.1 4.78,16.68 D1.A 5.48,17.15 U3.1
N$6  (via drill 0.3)
  Top 0.254: U3.2 7.36,19.21 7.1,19.47 v6.84,19.47 | D1.C 5.27,15.23 5.27,14.41 v5.52,14.16
  Bottom 0.254: v6.84,19.47 7.1,19.47 7.35,19.22 7.35,16.24 6.6,15.49 6.1,15.49 5.52,14.92 v5.52,14.16
N$7
  Top 0.254: LED6.A R30.1
N$8
  Top 0.254: R31.1 25.31,5.84 25.31,5.77 LED7.A
N$9
  Top 0.254: R10.1 14.09,22.13 U3.12
N$10
  Top 0.254: LED5.A R27.1
N$11
  Top 0.254: 23.11,1.27 R32.1 23.37,1.27 24.38,2.29 24.38,2.3 LED8.A
N$12
  Top 0.254: LED2.A R28.1
N$13
  Top 0.254: LED1.A R29.1
N$16  (via drill 0.3)
  Top 0.254: U3.11 12.92,21.32 10.6,23.63 10.6,24.49 9.4,25.69 v6.54,25.69 | R23.2 3,27.09 3.47,27.09 3.98,26.58 v4,26.58
  Bottom 0.254: v4,26.58 4.89,25.69 v6.54,25.69
N$17
  Top 0.254: R18.1 7.73,15.68 8.73,16.68 R20.2 8.96,16.83 U3.4
N$18
  Top 0.254: LED4.A R36.1
N$19
  Top 0.254: R26.1 20.34,3.27 LED0.A
N$22
  Top 0.254: R21.2 1.48,12.4 U$2.S2
  Top 0.813: U$2.S4 U$2.S3 U$2.S2 U$2.S1
N$23
  Top 0.254: LED3.A R37.1
N$26
  Top 0.305: U3.5 9.76,16.76 R13.2
N$30  (via drill 0.3)
  Top 0.305: R15.2 12.39,8.79 C10.2 12.38,8.84 v12.38,9.84 | U3.7 11.36,14.93 v12.38,13.91
  Bottom 0.305: v12.38,9.84 v12.38,13.91
N$31
  Top 0.305: C9.2 R14.2 12.89,6.79 13.4,7.3 13.4,10.83 9.84,14.39 R13.1 10.35,15.68 10.56,15.89 U3.6
P1.0  (via drill 0.3, 0.3 pad 0.25)
  Top 0.254: FR57XX.1 39.07,29.92 39.62,30.48 40.89,30.48 42.93,32.51 44.2,32.51 54.86,43.18 54.86,44.45 55.88,45.47 SV1.1 | v72.39,36.32 72.39,38.85 RF2.15 | v69.85,50.29 70.1,50.55 75.95,50.55 76.2,50.29 RF3.4 76.96,49.28 78.23,48.01 79.25,48.01 79.76,47.5 v79.76,37.34 81.03,37.34 81.28,37.08 81.28,33.02 79.5,31.24 76.2,31.24 75.44,30.48 75.44,25.65 76.2,24.89 76.2,19.05 77.98,17.27 77.98,7.11 77.47,6.6 66.55,6.6 66.03,7.12 RF1.5
  Bottom 0.254: SV1.1 57.15,50.55 69.6,50.55 v69.85,50.29 | v79.76,37.34 77.47,37.34 76.45,36.32 v72.39,36.32
P1.1  (via drill 0.3)
  Top 0.254: RF1.7 67.3,9.66 66.8,10.16 66.29,10.16 66.04,10.41 66.04,12.18 RF1.6 66.03,15.99 v66.04,16 | FR57XX.2 38.57,30.44 39.62,31.5 40.39,31.5 42.42,33.53 43.18,33.53 52.32,42.67 52.32,44.2 53.34,45.21 SV1.2 | RF3.6 73.91,49.28 74.93,48.26 74.93,45.72 75.95,44.7 78.49,44.7 78.74,44.45 78.74,38.1 75.18,34.54 75.18,33.78 74.93,33.53 74.93,23.37 v75.44,22.86
  Bottom 0.254: SV1.2 53.34,47.75 53.85,47.24 57.15,47.24 57.91,48.01 72.39,48.01 RF3.6 | v66.04,16 67.56,17.53 70.61,17.53 73.15,20.07 74.17,20.07 75.44,21.34 v75.44,22.86
P1.2  (via drill 0.3)
  Top 0.254: RF1.9 68.57,10.17 68.33,10.41 67.56,10.41 67.31,10.67 67.31,12.18 RF1.8 67.3,15.99 v67.31,16 | FR57XX.3 38.07,30.7 39.37,32 40.13,32 42.16,34.04 42.93,34.04 48.26,39.37 48.26,40.89 50.8,43.43 SV1.3 | RF3.8 71.37,49.28 72.39,48.26 72.39,46.48 73.66,45.21 74.68,45.21 75.69,44.2 77.72,44.2 78.23,43.69 78.23,38.86 78.23,38.61 78.23,38.35 75.69,35.81 74.93,35.81 74.68,35.56 74.68,34.04 74.42,33.78 74.42,22.61 74.93,22.1 74.93,20.32 74.68,20.07 v74.68,19.56
  Bottom 0.254: SV1.3 50.8,49.78 52.07,51.05 70.36,51.05 71.12,50.29 RF3.8 | v67.31,16 68.33,17.02 70.87,17.02 73.41,19.56 v74.68,19.56
P1.3  (via drill 0.3)
  Top 0.254: FR57XX.8 35.57,31.49 34.54,32.51 33.78,32.51 32.51,33.78 32.51,42.67 38.1,48.26 SV1.8 38.1,49.53 39.62,51.05 41.15,51.05 41.91,50.29 41.91,47.5 42.67,46.74 49.28,46.74 v49.53,46.99 | v56.64,33.02 56.13,33.53 56.13,44.2 58.42,46.48 RF3.17 | RF1.14 71.12,13.97 72.39,15.24 72.39,31.75 71.12,33.02 v62.23,33.02
  Bottom 0.254: v49.53,46.99 52.07,46.99 52.32,46.74 RF3.17 | v56.64,33.02 v62.23,33.02
P1.4  (via drill 0.3)
  Top 0.254: FR57XX.9 35.07,30.72 v34.42,31.37 33.78,32 33.27,32 32,33.27 32,43.18 35.56,46.74 SV1.9 | R35.1 25.5,27.3 NTC.2 25.69,27.72 26.71,27.72 28.45,29.46 32.77,29.46 v33.02,29.72
  Bottom 0.254: v33.02,29.72 34.42,31.12 v34.42,31.37
P1.5
  Top 0.254: FR57XX.10 34.57,29.7 31.5,32.77 31.5,44.7 33.02,46.23 SV1.10
P1.6  (via drill 0.3)
  Top 0.254: SV2.2 51.31,5.59 50.29,5.59 42.93,12.95 42.93,16.76 42.42,17.27 39.37,17.27 38.07,18.58 FR57XX.28 | 73.41,12.43 RF1.18 v73.66,13.97 | v57.91,11.18 57.91,12.95 56.64,14.22 56.64,32 55.63,33.02 55.63,44.45 56.39,45.21 56.39,46.99 57.15,47.75 57.15,49.02 57.4,49.28 RF3.18
  Bottom 0.254: SV2.2 53.59,3.56 57.91,7.87 v57.91,11.18 58.93,12.19 70.87,12.19 71.12,12.45 71.12,13.97 71.88,14.73 73.15,14.73 73.66,14.22 v73.66,13.97
P1.7  (via drill 0.3)
  Top 0.254: SV2.1 53.85,5.59 52.83,5.59 51.82,6.6 50.55,6.6 43.69,13.46 43.69,17.27 43.18,17.78 39.62,17.78 38.57,18.84 FR57XX.29 | RF1.20 74.92,10.4 v74.68,10.16 | RF3.15 60.71,46.74 58.17,44.2 57.66,44.2 57.15,43.69 57.15,34.54 58.17,33.53 58.17,15.49 59.69,13.97 59.69,11.68 59.94,11.43 59.94,10.92 59.44,10.41 v59.44,7.11 60.71,5.84 v74.42,5.84
  Bottom 0.254: SV2.1 v59.44,7.11 | v74.68,10.16 74.68,6.1 v74.42,5.84
P2.0  (via drill 0.3)
  Top 0.254: v19.3,40.39 21.59,40.39 J3.3 | RF3.3 76.96,46.74 78.49,45.21 78.99,45.21 79.25,44.96 79.25,37.85 77.47,36.07 v77.47,34.8 | v71.12,34.8 71.12,38.85 RF2.13 | v71.12,21.08 v71.12,30.99 | SV2.11 31.5,3.56 31.75,3.3 31.75,2.54 32.51,1.78 36.32,1.78 36.83,2.29 36.83,5.08 35.05,6.86 v35.05,11.94 35.05,14.73 34.57,15.22 FR57XX.21
  Bottom 0.254: J4.1 18.42,48.38 19.05,47.75 19.05,40.64 v19.3,40.39 | J3.3 23.88,39.12 24.38,38.61 24.38,36.07 22.86,34.54 22.86,22.86 23.88,21.84 26.92,21.84 27.69,22.61 30.99,22.61 31.75,21.84 33.8,21.84 34.57,21.08 34.57,15.98 35.05,15.49 v35.05,11.94 40.39,11.94 41.15,12.7 52.58,12.7 56.9,17.02 64.01,17.02 66.04,19.05 69.85,19.05 71.12,20.32 v71.12,21.08 | v77.47,34.8 v71.12,34.8 v71.12,30.99
P2.1  (via drill 0.3)
  Top 0.254: FR57XX.22 35.07,16.24 v35.81,15.49 35.81,7.11 38.1,4.83 SV2.8 | J4.6 25.91,49.53 25.91,41.91 v25.15,41.15
  Bottom 0.254: J3.5 24.64,41.66 v25.15,41.15 25.15,36.07 23.37,34.29 23.37,23.11 24.13,22.35 26.67,22.35 27.43,23.11 31.24,23.11 32,22.35 34.05,22.35 35.07,21.34 35.07,16.24 v35.81,15.49
P2.2  (via drill 0.3)
  Top 0.254: RF1.16 v72.39,13.97 | RF3.16 59.69,48.01 59.69,46.48 57.91,44.7 57.4,44.7 56.64,43.94 56.64,34.04 57.4,33.27 57.4,15.49 59.18,13.72 v59.18,11.18 58.67,10.67 58.67,2.79 57.66,1.78 41.91,1.78 40.64,3.05 SV2.7 37.59,6.6 37.59,14.73 35.57,16.76 FR57XX.23
  Bottom 0.254: v72.39,13.97 72.38,13.96 RF1.16 71.36,11.18 65.53,11.18 65.02,11.68 59.69,11.68 v59.18,11.18
P2.3  (via drill 0.3)
  Top 0.254: FR57XX.34 41.14,25.67 41.66,25.15 41.66,23.11 v41.15,22.61 | RF1.12 69.84,15.48 69.85,15.49 69.85,16.51 68.58,17.78 v62.74,17.78 62.23,17.78 61.21,18.8 61.21,37.08 59.18,39.12 59.18,40.64 59.94,41.4 59.94,42.93 60.96,43.94 62.48,43.94 63.5,44.96 64.01,44.96 64.26,45.21 66.8,45.21 67.31,45.72 67.31,48.01 RF3.10 | v45.72,18.8 v48.77,18.8
  Bottom 0.254: v62.74,17.78 49.78,17.78 v48.77,18.8 | v45.72,18.8 45.47,19.05 42.42,19.05 41.15,20.32 v41.15,22.61
P2.4  (via drill 0.3)
  Top 0.254: RF1.3 64.77,8.37 64.77,6.86 64.52,6.6 61.47,6.6 59.94,8.13 59.94,10.16 60.45,10.67 60.45,14.22 59.56,15.11 v59.56,18.41 59.44,18.54 59.44,33.78 57.66,35.56 57.66,43.43 57.91,43.69 58.42,43.69 60.45,45.72 61.98,45.72 62.23,45.97 62.23,47.5 63.5,48.77 RF3.14 | FR57XX.35 41.65,26.17 42.16,25.65 v42.16,22.61 | v46.23,19.56 48.26,19.56 48.77,20.07 v50.29,20.07
  Bottom 0.254: v59.56,18.41 59.44,18.29 52.07,18.29 v50.29,20.07 | v42.16,22.61 42.16,21.34 43.94,19.56 v46.23,19.56
P2.5  (via drill 0.3, 0.3 pad 0.25)
  Top 0.254: FR57XX.17 32.02,25.67 30.99,24.64 30.99,23.11 32.26,21.84 32.26,11.43 | v31.75,11.18 32,11.18 32.26,11.43 | 32.26,11.43 32.26,8.38 33.02,7.62 SV2.10 | RF3.7 71.12,45.47 v71.63,44.96 | v74.17,21.59 74.17,21.84 73.91,22.1 73.91,34.04 74.17,34.29 74.17,36.07 74.42,36.32 75.44,36.32 76.71,37.59 v76.71,38.1
  Bottom 0.254: v31.75,11.18 40.89,11.18 41.66,11.94 52.83,11.94 57.4,16.51 64.52,16.51 66.55,18.54 70.1,18.54 73.41,21.84 73.91,21.84 v74.17,21.59 | v76.71,38.1 74.68,38.1 71.63,41.15 v71.63,44.96
P2.6  (via drill 0.3, 0.3 pad 0.25)
  Top 0.254: FR57XX.18 32.28,25.17 31.5,24.38 31.5,23.37 32.77,22.1 32.77,9.14 34.29,7.62 34.29,4.83 SV2.9 | v54.86,40.64 54.86,32.77 56.13,31.5 56.13,13.97 56.64,13.46 v56.64,8.64
  Bottom 0.254: SV2.9 35.56,3.81 37.08,5.33 49.02,5.33 52.32,8.64 v56.64,8.64 | v54.86,40.64 55.12,40.89 59.18,40.89 60.96,42.67 67.06,42.67 67.56,43.18 67.56,44.96 68.33,45.72 73.15,45.72 73.66,46.23 RF3.5
P2.7  (via drill 0.3)
  Top 0.254: FR57XX.33 40.62,25.17 v40.89,24.89 | ACC.14 ACC.15 40.13,36.07 40.13,35.56 40.89,34.8 C15.1 | RF2.18 73.65,43.7 73.15,44.2 69.6,44.2 69.34,44.45 69.34,45.97 RF3.9 | v39.12,32.77 40.13,32.77 41.15,33.78 41.15,34.76 C15.1 | C15.1 42.67,34.8 43.69,35.81 43.69,37.23 C53.+ 43.84,37.34 45.47,37.34 47.5,39.37 47.5,45.47 47.75,45.72 v49.78,45.72 | v25.91,24.13 25.91,23.37 25.65,23.11 24.38,23.11 24.13,23.37 R35.2 23.55,25.73 23.37,25.91 23.37,28.7 24.12,29.45 R34.2
  Bottom 0.254: 40.64,25.15 v40.89,24.89 40.62,25.17 FR57XX.33 39.12,25.72 39.12,25.91 38.86,26.16 37.85,26.16 | 37.85,26.16 33.02,26.16 31.5,24.64 26.42,24.64 v25.91,24.13 | RF3.9 66.29,44.45 66.29,43.69 65.79,43.18 58.17,43.18 56.9,44.45 51.82,44.45 50.55,45.72 v49.78,45.72 | 37.85,26.16 37.85,31.5 v39.12,32.77
P3.0  (via drill 0.3)
  Top 0.254: ACC.12 37,37 v36.83,36.83 | v36.83,36.83 35.98,36.83 C16.1 | FR57XX.4 37.57,35.59 37.08,36.07 37.08,36.58 v36.83,36.83
  Bottom 0.254: SV1.4 48.01,49.28 40.39,41.66 40.39,40.64 39.88,40.13 39.88,38.61 38.86,37.59 38.86,37.34 38.61,37.08 37.42,37.08 37.34,37 37,37 v36.83,36.83
P3.1  (via drill 0.3)
  Top 0.254: ACC.10 36.89,38.3 v36.83,38.35 | FR57XX.5 37.07,32.78 35.81,34.04 34.8,34.04 34.54,34.29 34.54,37.59 35.05,38.1 36.58,38.1 v36.83,38.35 | C17.1 36.58,38.61 v36.83,38.35
  Bottom 0.254: SV1.5 45.21,49.28 44.7,48.77 44.7,48.26 42.93,46.48 42.16,46.48 40.89,45.21 40.89,43.18 39.88,42.16 39.88,41.15 39.37,40.64 39.37,39.12 38.61,38.35 v36.83,38.35
P3.2  (via drill 0.3)
  Top 0.254: ACC.8 38.78,41.06 v38.86,41.15 | FR57XX.6 36.57,32.52 35.56,33.53 34.29,33.53 33.78,34.04 33.78,38.86 35.31,40.39 37.59,40.39 38.35,41.15 v38.86,41.15 | C58.1 38.86,42.42 v38.86,41.15
  Bottom 0.254: SV1.6 43.18,48.77 39.88,45.47 39.88,43.35 38.86,42.33 v38.86,41.15
P3.3  (via drill 0.3)
  Top 0.254: FR57XX.7 36.07,32.01 v35.56,32.51 35.05,33.02 34.04,33.02 33.02,34.04 33.02,40.13 40.64,47.75 SV1.7 | LDR.1 25.43,33.27 24.64,33.27 24.13,32.77 24.13,32.31 R34.1
  Bottom 0.254: v35.56,32.51 30.73,32.51 29.97,33.27 25.88,33.27 LDR.1 25.65,33.27
P3.4  (via drill 0.3)
  Top 0.254: SV2.6 39.12,7.62 v39.12,8.38 39.12,14.48 38.86,14.73 38.35,14.73 36.07,17.02 FR57XX.24 | R27.2 29.21,10.41 29.72,9.91 30.73,9.91 v31.5,9.14
  Bottom 0.254: v39.12,8.38 38.86,8.13 32.51,8.13 v31.5,9.14
P3.5  (via drill 0.3)
  Top 0.254: FR57XX.25 36.58,17.27 38.35,15.49 39.37,15.49 40.13,14.73 40.13,9.14 v41.02,8.25 SV2.5 | v29.21,7.62 28.03,7.62 R30.2
  Bottom 0.254: v41.02,8.25 40.13,7.37 29.46,7.37 v29.21,7.62
P3.6  (via drill 0.3)
  Top 0.254: SV2.4 v44.32,7.49 41.15,10.67 41.15,15.49 40.39,16.26 38.61,16.26 37.07,17.8 FR57XX.26 | R31.2 28.45,5.84 v28.96,6.35
  Bottom 0.254: v44.32,7.49 43.18,6.35 v28.96,6.35
P3.7  (via drill 0.3)
  Top 0.254: FR57XX.27 37.57,20.85 37.59,20.83 37.59,18.03 38.86,16.76 41.66,16.76 42.16,16.26 42.16,12.19 v43.18,11.18 v46.86,7.49 SV2.3 | RF2.20 74.92,40.91 v74.93,40.89 | v73.66,20.83 73.41,21.08 73.41,32.26 73.15,32.51 73.15,34.04 73.66,34.54 73.66,36.58 73.91,36.83 75.18,36.83 75.95,37.59 v75.95,38.86 | R32.2 24.89,1.27 25.65,2.03 v25.65,3.81
  Bottom 0.254: v43.18,11.18 53.09,11.18 57.91,16 64.77,16 66.8,18.03 70.36,18.03 73.15,20.83 v73.66,20.83 | v74.93,40.89 74.93,39.88 v75.95,38.86 | v46.86,7.49 45.21,5.84 36.58,5.84 36.07,5.33 26.92,5.33 26.42,4.83 26.42,4.57 v25.65,3.81
P4.0  (via drill 0.3, 0.3 pad 0.25)
  Top 0.254: FR57XX.15 30.48,26.67 v29.97,26.16 | v60.45,36.32 58.67,38.1 58.67,41.91 | v29.97,30.48 29.97,48.77 SV1.11 | 72.39,34.04 72.39,32.51 72.9,32 72.9,17.78 v73.66,17.02 | 72.39,34.04 70.87,34.04 70.61,33.78 64.77,33.78 62.99,35.56 v62.99,36.07 | RF3.11 66.04,45.72 64.01,45.72 63.75,45.47 63.25,45.47 62.23,44.45 60.71,44.45 58.67,42.42 58.67,41.91 | v59.18,42.16 58.93,42.16 58.67,41.91 | RF2.19 74.92,37.58 74.68,37.34 73.41,37.34 73.15,37.08 73.15,34.8 72.39,34.04
  Bottom 0.254: v62.99,36.07 60.71,36.07 v60.45,36.32 | v29.97,26.16 v29.97,30.48 | SV1.11 30.48,49.78 31.75,51.05 49.02,51.05 49.53,50.55 49.53,48.01 48.77,47.24 48.77,43.69 50.04,42.42 58.93,42.42 v59.18,42.16 | v73.66,17.02 74.93,15.75 74.93,14.22 73.66,12.95 73.66,12.19 72.07,10.6 72.07,6.17 74.68,3.56 S1.2
P4.1  (via drill 0.3)
  Top 0.254: FR57XX.16 31.5,26.17 v30.73,25.4 | v30.73,31.5 v30.73,33.53 | RF3.13 63.5,45.97 62.99,45.97 61.98,44.96 60.45,44.96 58.17,42.67 58.17,37.34 60.45,35.05 v60.45,32.26 60.45,18.54 62.23,16.76 67.55,16.76 v68.31,16 68.07,15.76 68.07,13.46 68.57,12.97 RF1.10 68.58,12.18 68.58,11.18 69.6,10.16 v69.85,10.16
  Bottom 0.254: v60.45,32.26 55.37,32.26 53.59,34.04 44.45,34.04 43.69,33.27 39.62,33.27 39.37,33.53 v30.73,33.53 | v30.73,25.4 v30.73,31.5 | v69.85,10.16 69.85,6.93 S2.2
PJ.0
  Top 0.254: TP10.1 29.73,20.57 R29.2 26.92,21.42 26.92,21.84 27.69,22.61 27.69,27.69 28.67,28.67 FR57XX.11
PJ.1  (via drill 0.3)
  Top 0.254: FR57XX.12 28.93,28.17 28.19,27.43 28.19,22.1 v27.94,21.84 | TP11.1 29.69,18.03 R28.2 27.69,18.12 27.69,19.05 v27.69,19.3
  Bottom 0.254: v27.94,21.84 27.94,19.56 v27.69,19.3
PJ.2  (via drill 0.3)
  Top 0.254: FR57XX.13 29.19,27.67 28.7,27.18 28.7,22.1 v28.96,21.84 | R37.2 29.48,15.49 TP12.1
  Bottom 0.254: TP12.1 28.96,17.51 28.96,21.59 v28.96,21.84
PJ.3
  Top 0.254: FR57XX.14 29.45,27.17 29.21,26.92 29.21,23.37 29.72,22.86 30.48,22.86 31.75,21.59 31.75,13.97 31.5,13.72 TP13.1 29.46,13.72 28.7,12.95 R36.2
RESET  (via drill 0.3)
  Top 0.254: v16.45,18.23 17.21,18.99 17.21,21.76 R1.1 16.19,22.8 C1.1 v16.19,26.86 | v16.19,8.04 15.62,7.46 U2.2 | U1.58 4.2,38.72 4.18,38.7 4.05,38.7 3.75,38.39 3.75,36.64 2.03,34.92 TP2.1 2.03,34.02 2.03,33.72 2.07,33.72 2.95,32.84 2.95,31.73 3.3,31.37 8.57,31.37 v9.4,32.19
  Bottom 0.254: v16.45,18.23 16.98,17.69 16.98,8.83 v16.19,8.04 | v16.19,26.86 9.84,26.86 9.4,27.3 v9.4,32.19
RFPWR  (via drill 0.3)
  Top 0.254: 68.58,38.85 RF2.9 | 68.58,36.83 68.58,37.08 | C32.1 67.11,36.58 | C31.1 65.48,36.74
  Top 0.406: RF2.9 RF2.7 | 68.58,38.85 68.58,37.08 69.85,35.81 v70.1,35.81 | 68.58,36.83 68.33,36.58 67.11,36.58 | 65.48,36.74 C32.1
  Bottom 0.406: RF3.2 79.76,49.28 80.52,48.51 80.52,36.32 79.76,35.56 | v70.1,35.81 71.63,35.81 71.88,35.56 79.76,35.56 | 79.76,35.56 80.01,35.56 80.77,34.8 80.77,27.24 RF_PWR.2
RST3410  (via drill 0.3)
  Top 0.254: R11.1 12.13,15.68 12.13,15.51 12.97,14.67 v13.14,14.67 | v15.43,18.23 C8.1 14.7,19.73 U3.9 13.64,19.75 12.89,19.75 v9.34,23.3 | R12.2 4.43,15.26 v4.43,14.16 | U1.42 9.96,40.88 v9.97,40.89
  Bottom 0.254: v15.43,18.23 15.43,16.95 v13.14,14.67 7.71,14.67 6.57,13.53 4.92,13.53 4.43,14.01 v4.43,14.16 | v9.97,40.89 8.7,39.62 8.7,25.78 9.46,25.02 9.46,23.43 v9.34,23.3
RST/SBWTDIO  (via drill 0.3)
  Top 0.254: FR57XX.20 33.56,24.17 33.27,23.88 33.27,23.62 v33.66,23.24 34.04,22.86 34.04,14.22 34.29,13.97 34.29,10.67 v34.04,10.41 | 77.98,29.72 79.73,29.72 RST.2 | 77.98,29.72 76.96,28.7 R33.1 76.99,27.69 77.72,27.69 77.98,27.43 77.98,24.38 77.72,24.13 v77.72,21.59 | 77.98,29.72 77.64,29.72 C24.1
  Bottom 0.254: J3.7 25.65,44.2 25.91,43.94 25.91,36.07 23.88,34.04 23.88,23.37 24.38,22.86 26.42,22.86 27.18,23.62 31.5,23.62 32.26,22.86 33.27,22.86 v33.66,23.24 | TP15.1 30.21,9.64 30.48,9.91 31.75,9.91 32.26,10.41 v34.04,10.41 34.8,9.65 55.12,9.65 60.2,14.73 66.29,14.73 66.8,15.24 69.85,15.24 73.41,18.8 74.93,18.8 v77.72,21.59
SBWTCK
  Top 0.254: R4.2 14.95,49.98 16.76,49.98 20,46.74 J3.10
  Bottom 0.254: J3.10 20.32,47.82 20.89,48.39 20.89,50.61 J4.3
SBWTDIO
  Top 0.254: R5.2 14.99,48.79 14.99,48.89 15.56,49.47 16.51,49.47 18.99,46.99 18.99,45.53 J3.8
  Bottom 0.254: J4.4 22.22,48.32 21.59,47.69 21.59,45.52 20.32,44.25 J3.8
SCL  (via drill 0.3)
  Top 0.254: R23.1 R25.2 1.99,28.62 1.99,27.88 v4,27.88 | v4,29.98 v4,29.99 U5.6 5.92,29.97 8.95,29.97 v11.18,32.19 | U1.31 16.51,42.73 15.24,42.73 v15.05,42.55
  Bottom 0.254: v4,27.88 v4,29.98 | v11.18,32.19 11.37,32.38 11.37,38.86 v15.05,42.55
SDA  (via drill 0.3)
  Top 0.254: U3.10 13.64,20.51 12.94,20.51 10.1,23.35 10.1,24.26 9.25,25.11 7.28,25.11 v7.15,24.98 | R24.2 1.99,30.42 2.38,30.8 4.51,30.8 4.67,30.64 U5.5 v7.01,30.65 7.07,30.63 7.05,30.61 8.7,30.61 v10.29,32.19 | U1.29 15.24,41.72 v15.05,41.53
  Bottom 0.254: v7.15,24.98 7.18,25.01 7.18,30.42 7.02,30.57 v7.01,30.65 | v15.05,41.53 14.8,41.53 11.87,38.61 11.87,31.94 11.49,31.56 10.86,31.56 10.29,32.13 v10.29,32.19
TEST/SBWTCK  (via drill 0.3)
  Top 0.254: FR57XX.19 32.79,24.67 32.51,24.38 v32.51,23.62 32.51,23.11 33.27,22.35 33.27,12.7 v33.53,12.45
  Bottom 0.254: J3.9 25.91,46.74 26.67,45.97 26.67,36.07 24.38,33.78 24.38,23.62 24.64,23.37 26.16,23.37 26.92,24.13 32,24.13 v32.51,23.62 | TP14.1 30.23,11.68 30.99,12.45 v33.53,12.45
UCTS
  Top 0.254: U3.13 14.23,22.93 14.54,23.24 14.54,28.83 17.65,31.94 17.65,35.88 17.27,36.26 16.51,36.26 U1.18
UDSR
  Top 0.254: U3.14 12.97,23.73 12.64,24.07 12.64,25.97 14.03,27.37 14.03,29.08 16.19,31.24 16.19,35.71 U1.17
UDTR
  Top 0.254: U3.21 8.95,29.21 11.11,31.37 13.59,31.37 14.48,32.26 14.48,33.65 U1.16
URTS  (via drill 0.3)
  Top 0.254: U3.20 9.78,26.85 9.78,27.62 10.16,28 v10.16,28.07 | U1.15 13.97,32.89 v13.14,32.07
  Bottom 0.254: v10.16,28.07 11.24,29.15 11.24,30.16 v13.14,32.07
URXD
  Top 0.254: U3.19 10.56,27.39 10.86,27.69 12.26,27.69 13.02,28.45 13.02,29.59 15.18,31.75 15.18,34.81 13.91,36.08 13.91,43.12 14.46,43.67 U1.33
UTXD
  Top 0.254: U3.17 12.68,27.34 12.69,27.34 13.53,28.18 13.53,29.34 15.68,31.5 15.68,34.99 14.41,36.26 14.41,42.94 14.69,43.22 U1.32
VCC  (via drill 0.3)
  Top 0.254: MSP_PWR.1 80.45,16.76
  Top 0.406: J3.1 22.86,36.32 22.35,35.81 22.35,4.83 22.61,4.57 26.92,4.57 SV2.12 | TP8.1 78.49,11.93 78.49,8.38 J6.1 79.24,5.07 C20.2 79.08,3.65 C23.2 78.59,1.78 v75.95,1.78 | RF_PWR.1 80.07,24.45 78.74,23.11 78.74,17.53 79.5,16.76 80.45,16.76
  Bottom 0.406: SV2.12 27.94,3.05 29.21,1.78 v75.95,1.78 | MSP_PWR.1 80.52,13.98 TP8.1
VCC_MSP  (via drill 0.3)
  Top 0.254: FR57XX.32 40.1,24.67 40.89,23.88 v40.89,23.62 | 39.91,28.74 39.91,28.67 FR57XX.40 | 40.89,21.84 C19.1
  Top 0.406: v40.64,29.46 39.91,28.74 | v44.2,20.57 43.69,20.57 42.84,21.42 C18.1 C19.1 | 40.89,21.84 40.39,22.35 40.39,23.11 v40.89,23.62 | v76.96,24.89 R33.2
  Bottom 0.254: 42.16,24.64 42.16,24.38 41.4,23.62 v40.89,23.62 | 48.01,20.57 48.26,20.83
  Bottom 0.406: 76.96,24.38 72.64,24.38 69.85,21.59 56.13,21.59 55.37,20.83 48.26,20.83 47.5,20.07 TP17.1 | v40.64,29.46 41.66,29.46 42.16,28.96 42.16,24.64 | v44.2,20.57 48.01,20.57 | MSP_PWR.2 TP9.1 79.76,21.84 77.22,24.38 76.96,24.38 | 76.96,24.38 v76.96,24.89
VCORE
  Top 0.254: TP16.1 45.97,16.76 45.97,17.27 44.7,18.54 44.7,18.8 42.93,20.57 39.88,20.57 39.43,21.02 C14.1 39.37,21.49 39.37,22.35 39.07,22.66 FR57XX.30
XIN1
  Top 0.254: C3.1 7.81,49.02 7.79,49.04 6.78,49.04 6.6,49.02 6.6,48.64 6.48,48.77 Q1.P$3 6.28,49.47 5.78,49.47 5.02,48.7 5.02,45.72 6.29,44.45 6.29,42.1 5.9,41.72 U1.52
XINR
  Top 0.254: 39.68,27.18 FR57XX.37 42.94,27.17 43.43,26.67 43.43,24.13 43.69,23.88 44.17,23.88 | C22.2 44.17,23.88 | 44.17,23.88 46.88,23.88 Q2.1
XOUT1
  Top 0.254: C2.1 1.06,47.45 1.46,47.05 2.81,47.05 Q1.P$1 3.75,46.1 3.75,41.59 4.12,41.22 U1.53
XOUTR
  Top 0.254: Q2.2 46.78,29.49 C21.2 43.63,29.46 43.43,29.46 43.18,29.21 43.18,27.94 42.91,27.67 FR57XX.38
XT1_GND  (via drill 0.3)
  Top 0.254: 39.62,28.17 40.97,28.17 41,28.19 42.16,28.19 42.42,28.45 42.42,29.46 43.94,30.99 51.56,30.99 52.58,29.97 v52.58,29.46 | 39.62,26.67 42.16,26.67 42.67,26.16 42.67,23.88 44.45,22.1 50.8,22.1 v52.58,23.88
  other vias: 45.47,26.67
  pour Top (isolate 0.254): 39.88,27.94 39.88,26.67 arc90 40.39,25.91 42.93,22.61 arc90 44.2,21.34 53.85,21.34 arc90 55.37,22.86 55.37,29.97 arc90 53.59,31.75 44.45,31.75 arc90 41.91,28.7 40.39,28.7 arc90
  pour Bottom (isolate 0.406): 39.88,28.19 39.88,26.67 arc90 40.13,26.16 42.93,22.61 arc90 44.2,21.34 53.85,21.34 arc90 55.37,22.86 55.37,29.97 arc90 53.59,31.75 44.45,31.75 arc90 41.91,28.7 40.64,28.7 arc90

## Text on the board
tPlace: P4.0 | P1.5 | P1.4 | P1.3 | P3.3 | P3.2 | P3.1 | P3.0 | P1.2 | P1.1 | P1.0 | TEST | RST | RXD | RST | TXD | VCC | 1 | EMULATION | 1 | Rev.1.1 | MSP-EXP430FR5739 | GND | P2.0 | P2.5 | P2.6 | P2.1 | P2.2 | P3.4 | P3.5 | P3.6 | P3.7 | P1.6 | P1.7 | GND | PWR | VCC | S2 | S1 | VCC
tNames: LDR
Measures: 50.0 mm | 66.0 mm